# EAGLE board 555-pwm-eagle (EAGLE 5.07)

Size 40.64 x 30.53 mm. Coordinates in mm from the lower left corner, seen from the top.
Outline: 0,0 40.64,0 40.64,30.48 0,30.53 0,0
Copper layers (1*16): Top 0.035mm / dielectric 1.5mm / Bottom 0.035mm
Design rules "digital-toy": minimum track width 10mil, minimum drill 24mil, track to track 10mil, track to pad 10mil, pad to pad 10mil, via to via 10mil, smd to smd 10mil, copper to edge 40mil, drill to drill 10mil, minimum pad ring 10mil, minimum via ring 10mil, stop-mask expansion 4mil, vias tented up to drill 0mil, thermal gap 10mil

## Footprints (pad centres in the part's own frame; a part is rotated, then mirrored left to right if it is on the bottom)
C0805K = smd 1.3 x 1.6: 1 -1,0; 2 1,0
CPOL-RADIAL-100UF-25V = drill 0.7 pad 1.651 square: 1 1.27,0 | drill 0.7 pad 1.651 round: 2 -1.27,0
DO35-7 = drill 0.813 long: A 3.81,0; C -3.81,0
2,8 = hole 2.8: 0,0
DIL-08 = drill 0.813 long: 1 -3.81,-3.81; 2 -1.27,-3.81; 3 1.27,-3.81; 4 3.81,-3.81; 5 3.81,3.81; 6 1.27,3.81; 7 -1.27,3.81; 8 -3.81,3.81
POWER_JAXK_2.1MMX5.5MM = drill 2.3 round: GND 0,7.7; GNDBREAK 4.446,10.7; PWR 0,13.7
1X02 = drill 1.016 long: 1 -1.27,0; 2 1.27,0
CHIP-LED0805 = smd 1.2 x 1.2: A 0,-1.05; C 0,1.05
M0805 = smd 1.3 x 1.6: 1 -0.95,0; 2 0.95,0
B64Y = drill 0.813 long: A 2.54,0; E -2.54,0; S 0,0

## Placement (x,y rotation side)
C1  0.1  [C0805K]  26.29,16.51 0 top
C2  0.01  [C0805K]  20.32,25.27 90 top
C3  470uf  [CPOL-RADIAL-100UF-25V]  27.94,26.67 0 top
D1  1N4148DO35-7  [DO35-7]  5.97,11.43 270 top
D2  1N4148DO35-7  [DO35-7]  10.03,12.45 90 top
H1  MOUNT-HOLE2.8  [2,8]  37.47,27.3 0 top
H2  MOUNT-HOLE2.8  [2,8]  3.3,3.17 0 top
H3  MOUNT-HOLE2.8  [2,8]  3.17,27.43 0 top
H4  MOUNT-HOLE2.8  [2,8]  37.34,3.43 0 top
IC1  NE555  [DIL-08]  27.05,8.26 90 top
J2  POWER_JACKPTH_GUIDE  [POWER_JAXK_2.1MMX5.5MM]  12.95,33.53 180 top
JP1  PWM  [1X02]  36.96,12.57 180 top
LED1  RED  [CHIP-LED0805]  5.33,18.54 0 top
R1  1k  [M0805]  16.51,15.49 180 top
R2  1k  [M0805]  36.7,17.27 0 top
R3  50k  [B64Y]  15.49,5.08 180 top
R4  500  [M0805]  5.33,22.35 270 top

## Library data of the parts
C1 C2 R1 R2 R4 = rcl
C3 = SparkFun
D1 D2 = diode
H1-H4 = holes
IC1 = st-microelectronics
J2 = digital-toy
JP1 = pinhead
LED1 = led
R3 = pot

## Nets
GND: C1.2 C2.2 C3.2 IC1.1 J2.GND JP1.2 R4.1
N$1: C1.1 IC1.2 IC1.6 R3.S
N$2: D1.C D2.A IC1.7 R1.2
N$4: LED1.C R4.2
N$5: JP1.1 R2.2
N$6: C2.1 IC1.5
N$7: D1.A R3.A
N$8: IC1.3 R2.1
N$9: D2.C R3.E
VCC+: C3.1 IC1.4 IC1.8 J2.PWR LED1.A R1.1

## Tracks (layer width: path | path; a pad name or v marks a point on that pad's centre or on a via)
GND  (6 unrouted)
N$1  (3 unrouted)
N$2  (3 unrouted)
N$4  (1 unrouted)
N$5  (1 unrouted)
N$6  (1 unrouted)
N$7  (1 unrouted)
N$8  (1 unrouted)
N$9  (1 unrouted)
VCC+  (5 unrouted)

## Text on the board
Top: 555 PWM V1